# EAGLE board PandaSat_Payload (EAGLE 9.2.2)
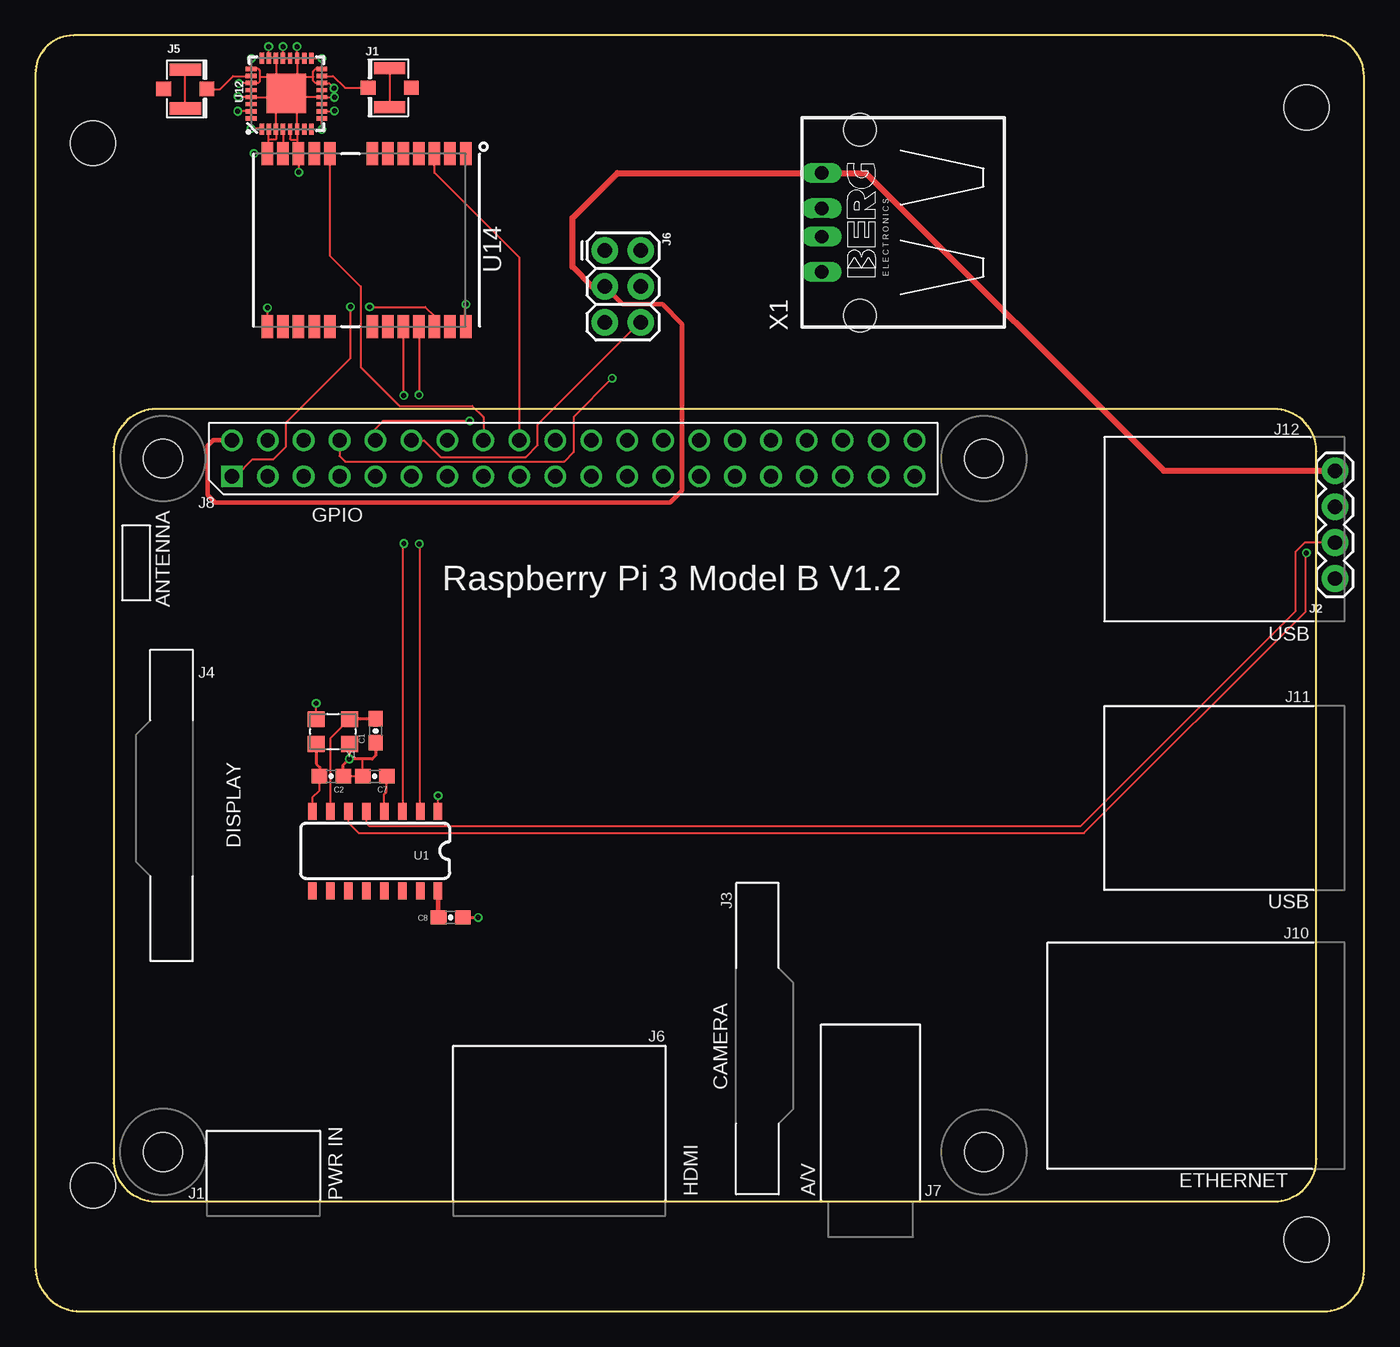
[diagram p0: board, top side]
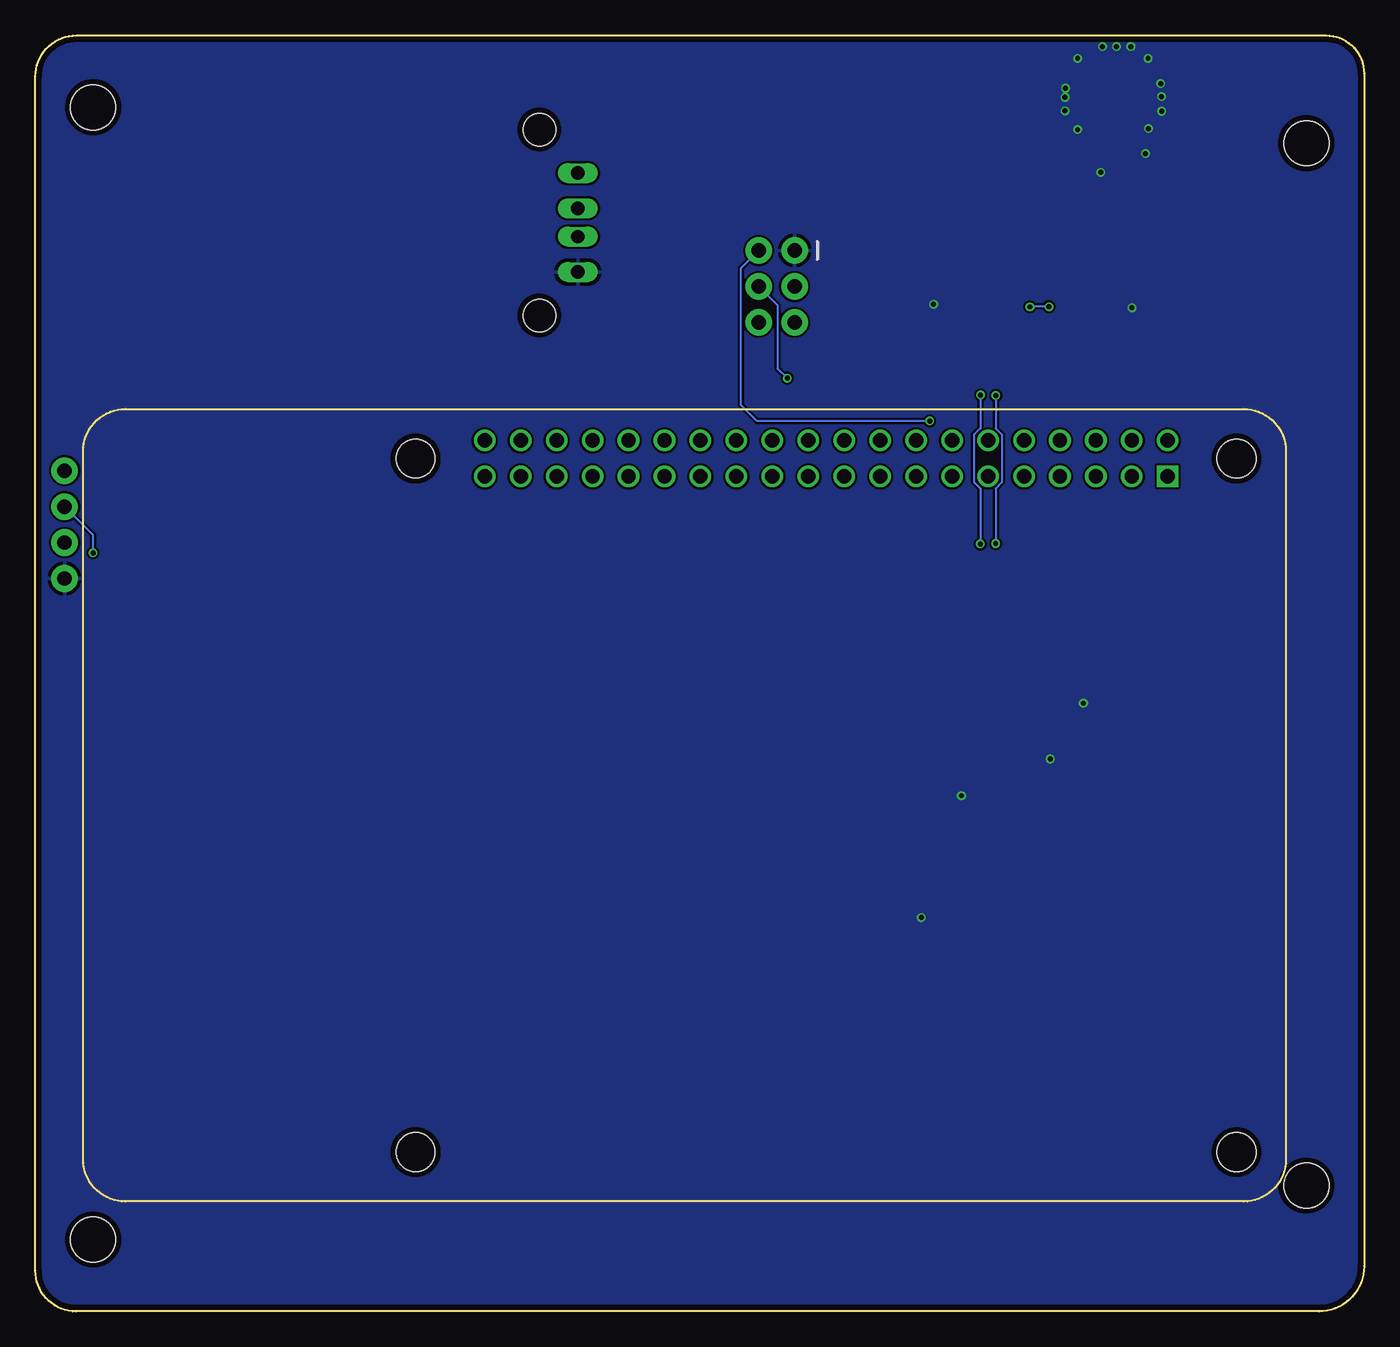
[diagram p1: board, bottom side, seen from below]

Size 93.89 x 90.17 mm. Coordinates in mm from the lower left corner, seen from the top.
Outline: 0,87.48 0,3.19 arc90 3.19,0 91.01,0 arc90 93.89,2.88 93.89,87.25 arc90 90.97,90.17 2.69,90.17 arc90 0,87.48
Copper layers (1*16): Top 0.035559375mm / dielectric 1.6mm / Bottom 0.035559375mm
Design rules "oshpark-2layer": minimum track width 6mil, minimum drill 10mil, track to track 6mil, track to pad 6mil, pad to pad 6mil, via to via 6mil, smd to smd 6mil, copper to edge 15mil, drill to drill 6mil, minimum pad ring 5mil, minimum via ring 5mil, stop-mask expansion 2.5mil, vias tented up to drill 0mil, thermal gap 10mil
Net classes: 1 power: width 0.178 mm
Holes 3.18 mm at 4.08,8.89 89.81,5.08 89.81,85.09 4.08,82.55

## Footprints (pad centres in the part's own frame; a part is rotated, then mirrored left to right if it is on the bottom)
0603-CAP = smd 1.1 x 1: 1 -0.85,0; 2 0.85,0
U.FL = smd 2.2 x 0.85: 1 0,1.375; 2 0,-1.375 | smd 1.05 x 1: FEED 1.525,0; NC -1.525,0
1X04 = drill 1.016 pad 1.88: 1 0,0; 2 2.54,0; 3 5.08,0; 4 7.62,0
2X3 = drill 1.016 pad 1.88: 1 0,0; 2 0,2.54; 3 2.54,0; 4 2.54,2.54; 5 5.08,0; 6 5.08,2.54
RPI3 = drill 1.016 square: P$1 8.37,51.23 | drill 1.016: P$2 8.357,53.772; P$3 10.897,51.232; P$4 10.897,53.772; P$5 13.437,51.232; P$6 13.437,53.772; P$7 15.977,51.232; P$8 15.977,53.772; P$9 18.517,51.232; P$10 18.517,53.772; P$11 21.057,51.232; P$12 21.057,53.772; P$13 23.597,51.232; P$14 23.597,53.772; P$15 26.137,51.232; P$16 26.137,53.772; P$17 28.677,51.232; P$18 28.677,53.772; P$19 31.217,51.232; P$20 31.217,53.772; P$21 33.757,51.232; P$22 33.757,53.772; P$23 36.297,51.232; P$24 36.297,53.772; P$25 38.837,51.232; P$26 38.837,53.772; P$27 41.377,51.232; P$28 41.377,53.772; P$29 43.917,51.232; P$30 43.917,53.772; P$31 46.457,51.232; P$32 46.457,53.772; P$33 48.997,51.232; P$34 48.997,53.772; P$35 51.537,51.232; P$36 51.537,53.772; P$37 54.077,51.232; P$38 54.077,53.772; P$39 56.617,51.232; P$40 56.617,53.772 | hole 2.75: 3.5,3.5; 61.5,3.5; 3.5,52.5; 61.5,52.5
SO016 = smd 0.6 x 1.2: 1 -4.445,-2.8; 2 -3.175,-2.8; 3 -1.905,-2.8; 4 -0.635,-2.8; 5 0.635,-2.8; 6 1.905,-2.8; 7 3.175,-2.8; 8 4.445,-2.8; 9 4.445,2.8; 10 3.175,2.8; 11 1.905,2.8; 12 0.635,2.8; 13 -0.635,2.8; 14 -1.905,2.8; 15 -3.175,2.8; 16 -4.445,2.8
QFN32-5X5MM = smd 0.762 x 0.305: 1 -2.5,1.75; 2 -2.5,1.25; 3 -2.5,0.75; 4 -2.5,0.25; 5 -2.5,-0.25; 6 -2.5,-0.75; 7 -2.5,-1.25; 8 -2.5,-1.75; 17 2.5,-1.75; 18 2.5,-1.25; 19 2.5,-0.75; 20 2.5,-0.25; 21 2.5,0.25; 22 2.5,0.75; 23 2.5,1.25; 24 2.5,1.75 | smd 0.305 x 0.762: 9 -1.75,-2.5; 10 -1.25,-2.5; 11 -0.75,-2.5; 12 -0.25,-2.5; 13 0.25,-2.5; 14 0.75,-2.5; 15 1.25,-2.5; 16 1.75,-2.5; 25 1.75,2.5; 26 1.25,2.5; 27 0.75,2.5; 28 0.25,2.5; 29 -0.25,2.5; 30 -0.75,2.5; 31 -1.25,2.5; 32 -1.75,2.5 | smd 2.794 x 2.794: EP 0,0
S1216_24PIN_PACKAGE = smd 1.626 x 0.813: 1 5.85,-7.62; 2 5.85,-6.52; 3 5.85,-5.42; 4 5.85,-4.32; 5 5.85,-3.22; 6 5.85,-2.12; 7 5.85,-1.02; 8 5.85,1.98; 9 5.85,3.08; 10 5.85,4.18; 11 5.85,5.28; 12 5.85,6.38; 13 -6.35,6.38; 14 -6.35,5.28; 15 -6.35,4.18; 16 -6.35,3.08; 17 -6.35,1.98; 18 -6.35,-1.02; 19 -6.35,-2.12; 20 -6.35,-3.22; 21 -6.35,-4.32; 22 -6.35,-5.42; 23 -6.35,-6.52; 24 -6.35,-7.62
PN87520 = drill 0.95 long: 1 -3.5,2.71; 2 -1,2.71; 3 1,2.71; 4 3.5,2.71 | hole 2.3: -6.57,0; 6.57,0
CRYSTAL-SMD-3.2X2.5 = smd 1.2 x 1.1: 1 -1.175,-0.875; 2 1.175,-0.875; 3 1.175,0.875; 4 -1.175,0.875

## Placement (x,y rotation side)
C1  10pF  [0603-CAP]  24.05,41.02 90 top
C2  10pF  [0603-CAP]  20.91,37.82 180 top
C7  10nF  [0603-CAP]  23.99,37.82 180 top
C8  0.1uF  [0603-CAP]  29.34,27.84 0 top
FRAME1  FRAME-LETTERNO_PACKAGE  [DUMMY]  -75.23,-0.08 0 top  (outside the outline)
FRAME2  FRAME-LETTERNO_PACKAGE  [DUMMY]  -76.24,-1.1 0 top  (outside the outline)
J1  U.FL  [U.FL]  25.04,86.46 180 top
J2  [1X04]  91.83,51.79 90 top
J5  U.FL  [U.FL]  10.6,86.38 0 top
J6  FEMALE 2x3  [2X3]  40.24,74.97 270 top
PCB1  RPI3RPI3  [RPI3]  5.52,7.77 0 top
U1  CH340G  [SO016]  24.01,32.53 180 top
U12  EP2W+  [QFN32-5X5MM]  17.75,86.05 90 top
U14  S1216V8  [S1216_24PIN_PACKAGE]  22.78,75.95 90 top
X1  [PN87520]  58.27,76.95 90 top
Y1  12MHz  [CRYSTAL-SMD-3.2X2.5]  21.02,40.97 180 top

## Library data of the parts
C1 C2 = SparkFun-Capacitors; PROD_ID: CAP-11812
C7 = SparkFun-Capacitors; PROD_ID: CAP-00867
C8 = SparkFun-Capacitors; PROD_ID: CAP-00810
FRAME1 FRAME2 = SparkFun-Aesthetics; DESIGNER: Nobody; VERSION: v01
J1 J5 = SparkFun-Connectors; PROD_ID: CONN-09193; SF_ID: WRL-09144
J2 = SparkFun-Connectors; PROD_ID: CONN-09696
J6 = SparkFun-Connectors; PROD_ID: CONN-11566
PCB1 = e14_Rpi3_RevA+mirror-pcb
U1 = SparkFun-DigitalIC; PROD_ID: IC-13498
U12 U14 = maholli
X1 = con-berg; OC_FARNELL: unknown; OC_NEWARK: unknown
Y1 = USB Basic; PROD_ID: XTAL-13518

## Nets
!CTS: U1.9
!DTR: U1.13
D+: X1.2
D-: X1.3
ENABLE1: J6.6 PCB1.P$12
ENABLE2: J6.5
GND: C1.1 C2.1 C7.2 C8.2 J2.1 J6.1 U1.1 U12.1 U12.2 U12.3 U12.5 U12.6 U12.7 U12.8 U12.9 U12.10 U12.11 U12.12 U12.13 U12.14 U12.16 U12.17 U12.18 U12.19 U12.20 U12.21 U12.22 U12.23 U12.24 U12.25 U12.27 U12.28 U12.29 U12.30 U12.31 U12.32 U12.EP U14.10 U14.12 U14.13 U14.24 X1.1 Y1.2 Y1.4
GPS_ANTENNA_1: J1.1 J1.2
GPS_ANTENNA_2: J5.1 J5.2
GPS_CLK: PCB1.P$18 U14.3
GPS_RSTN: PCB1.P$16 U14.8
N$2: C2.2 U1.8 Y1.3
N$5: C1.2 U1.7 Y1.1
RF_IN: U12.4 U14.11
RXI: U1.3 U14.20
TXO: U1.2 U14.21
U.FL1: J1.FEED U12.15
U.FL2: J5.FEED U12.26
UART2_RX: J6.2 PCB1.P$10
UART2_TX: J6.4 PCB1.P$8
UD+: J2.2 U1.5
UD-: J2.3 U1.6
V1: C7.1 U1.4
VCC: C8.1 U1.16
VCC3.3: PCB1.P$1 U14.22 U14.23
VCC5: J2.4 J6.3 PCB1.P$2 X1.4

## Tracks (layer width: path | path; a pad name or v marks a point on that pad's centre or on a via)
ENABLE1
  Top 0.152: PCB1.P$12 27.46,61.54 28.63,60.37 34.66,60.37 35.49,61.21 35.49,62.65 42.73,69.89 J6.6
GND  (via drill 0.35)
  Top 0.152: U12.EP 17.82,85.93 18.5,85.25 U12.6 | U12.10 U12.9 v20.24,83.52 20.21,83.55 U12.8 U12.7 U12.6 | U12.10 U12.11 U12.12 | U12.12 U12.13 U12.14 | U14.12 16.5,81.9 | 19.64,87.22 19.64,86.95 19.8,86.79 U12.14 | 19.64,87.22 19.64,87.62 19.82,87.8 U12.16 v20.25,88.54 v20.24,88.54 v20.24,88.55 U12.17 U12.18 U12.19 | U12.19 U12.20 U12.21 | U12.21 U12.22 | U12.23 16.52,88.58 16.98,88.58 U12.22 | U12.23 U12.24 v15.27,88.55 v15.27,88.54 15.25,88.53 U12.25 15.73,87.81 15.86,87.67 15.86,87.25 | 15.86,87.25 15.86,86.9 15.75,86.79 U12.27 | 22.31,40.21 Y1.4 22.2,39.06 v22.17,39.04 | 20.29,41.85 Y1.2 v19.84,42.97 v19.84,42.98 | 16.4,69.65 U14.13 16.4,70.91 v16.41,70.92 | U14.24 30.37,69.63 30.37,71.11 v30.43,71.17 | C1.1 24.05,40.5 | U14.12 16.5,81.8 16.5,82.8 | 16.5,82.8 U12.2 | U12.3 17,85.63 17.17,85.8 | U12.3 17,82.84 16.96,82.8 16.5,82.8 | U12.6 18.5,82.8 | 18.5,82.8 18.5,81.9 U14.10 18.6,80.51 v18.62,80.49 | 18.5,82.8 18.04,82.8 18,82.85 U12.5 U12.6 | U12.2 U12.1 16,83.58 15.98,83.59 v15.24,83.59 v15.25,83.6 U12.32 U12.31 | U12.2 U12.3 | U14.12 15.46,81.8 v15.44,81.81 | U12.31 U12.30 U12.29 | U12.29 U12.28 U12.27 | U12.23 16.5,89.37 v16.48,89.38 | U12.21 v17.5,89.38 | U12.19 v18.5,89.37 v18.49,89.38 | U12.27 14.41,86.8 v14.38,86.77 | U12.29 14.38,85.8 v14.33,85.85 | U12.31 15.24,84.81 v14.3,84.81 | 15.86,87.25 16.55,87.25 17,86.8 | 17,86.8 17.59,86.22 | 17.59,86.22 U12.EP | 19.64,87.22 18.59,87.22 18.5,87.13 | 18.5,87.13 17.59,86.22 | U12.29 17.17,85.8 | 17.17,85.8 17.59,86.22 | U12.12 18,85.8 U12.EP | U12.22 17,86.8 | U12.19 18.5,87.13 | U12.14 20.74,86.8 v21.11,86.44 | U12.12 v21.13,85.8 | U12.10 21.1,84.8 v21.13,84.84 | U1.1 v28.45,36.45
  Top 0.152: C2.1 C7.2 23.14,39.04
  Top 0.203: C8.2 v31.29,27.84 | C2.1 21.76,38.62 v22.17,39.04 23.14,39.04 23.8,39.04 24.05,39.29 C1.1
  Bottom 0.152: J6.1
  pour Bottom: -1,91 95,91 95,-2 -1,-2
GPS_ANTENNA_1
  Top 0.152: J1.2 J1.1
GPS_ANTENNA_2
  Top 0.152: J5.2 10.56,85.05 10.56,87.72 J5.1
GPS_CLK
  Top 0.152: PCB1.P$18 34.2,74.47 28.2,80.46 U14.3
GPS_RSTN
  Top 0.152: U14.8 20.8,74.61 22.99,72.42 22.99,66.73 25.74,63.98 30.86,63.98 31.66,63.19 PCB1.P$16
N$2
  Top 0.152: C2.2 20.06,36.8 19.57,36.3 U1.8
  Top 0.203: Y1.3 19.84,38.7 20.09,38.46 20.09,37.85 C2.2
N$5
  Top 0.152: 20.84,35.25 U1.7 20.84,40.49 Y1.1
  Top 0.203: 24.02,41.85 C1.2 22.22,41.88 Y1.1
RF_IN
  Top 0.152: U12.4 U14.11
RXI  (via drill 0.35)
  Top 0.152: U14.20 26,64.75 v26.03,64.72 | v26.04,54.26 25.93,54.16 25.93,35.35 U1.3
  Bottom 0.152: v26.04,54.26 v26.03,54.27 26.03,58.15 25.59,58.59 25.59,61.95 26.03,62.4 v26.03,64.72
TXO  (via drill 0.35)
  Top 0.152: U14.21 v27.1,64.76 | v27.12,54.23 27.13,54.22 27.13,35.38 U1.2
  Bottom 0.152: v27.1,64.76 27.1,62.42 27.57,61.95 27.57,58.59 27.12,58.15 v27.12,54.24 v27.12,54.23
U.FL1
  Top 0.152: U12.15 21.04,87.3 21.88,86.46 J1.FEED
U.FL2
  Top 0.152: 11.93,86.58 J5.FEED 13.04,86.38 13.96,87.3 U12.26
UART2_RX  (via drill 0.35)
  Top 0.152: v30.7,62.93 30.69,62.92 24.57,62.92 24.04,62.38 PCB1.P$10
  Bottom 0.152: v30.7,62.93 42.92,62.93 44.04,64.05 44.04,73.71 J6.2
UART2_TX  (via drill 0.35)
  Top 0.152: PCB1.P$8 21.5,60.45 21.89,60.05 37.38,60.05 38.03,60.71 38.03,63.21 v40.76,65.94
  Bottom 0.152: v40.76,65.94 41.45,66.63 41.47,66.63 41.47,71.12 J6.4
UD+
  Top 0.152: U1.5 23.38,34.52 23.59,34.3 73.86,34.3 89.06,49.5 89.06,53.7 89.69,54.33 J2.2
UD-  (via drill 0.35)
  Top 0.152: U1.6 22.11,34.54 22.84,33.8 74.1,33.8 89.72,49.42 89.72,53.5 v89.82,53.6
  Bottom 0.152: v89.82,53.6 89.82,54.86 J2.3
V1
  Top 0.152: C7.1 24.81,37.73 24.81,36.72 24.64,36.56 U1.4
VCC
  Top 0.305: C8.1 28.49,27.86 28.46,27.89 28.46,29.66 28.45,29.67 U1.16
VCC3.3  (via drill 0.35)
  Top 0.152: v22.26,71 22.26,67.37 17.71,62.82 17.71,61.11 16.83,60.22 15.37,60.22 14.14,59 PCB1.P$1 | v23.62,70.98 27.55,70.98 28.2,70.34 U14.22 U14.23
  Bottom 0.152: v22.26,71 22.29,71.03 23.57,71.03 v23.62,70.98
VCC5
  Top 0.152: 40.35,72.43 J6.3
  Top 0.305: J6.3 41.5,71.17 44.3,71.17 45.7,69.77 45.7,58.01 44.86,57.17 12.7,57.17 12.19,57.68 12.19,61.19 12.57,61.57 13.85,61.57 PCB1.P$2
  Top 0.406: J6.3 39.33,72.43 37.95,73.81 37.95,77.27 41.13,80.45 X1.4 58.69,80.45 79.73,59.41 J2.4